# Altium PCB multi-rc522.PcbDoc
Units mil, origin at the board's own origin, x right, y up, seen from the top; angles counter-clockwise.
Board outline 3937.01 x 2300 mil, 2 copper layers (Top Layer, Bottom Layer); 37 components, 33 nets, 181 pads, 334 vias.
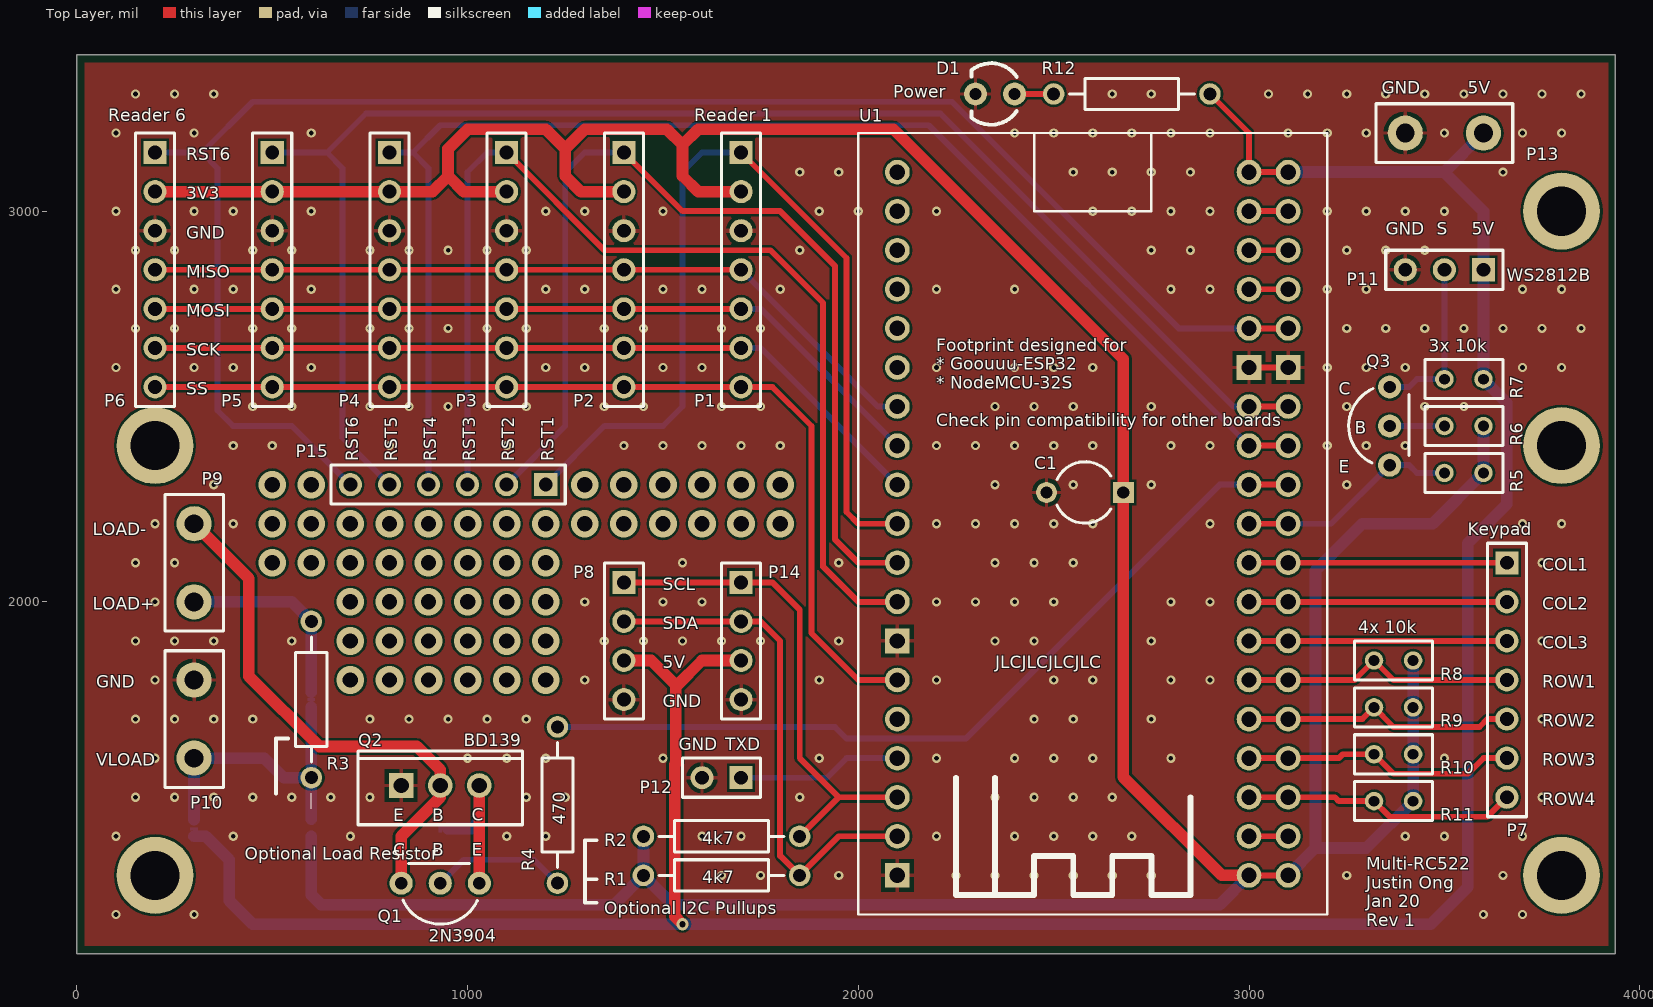
[diagram p0: Top Layer view]
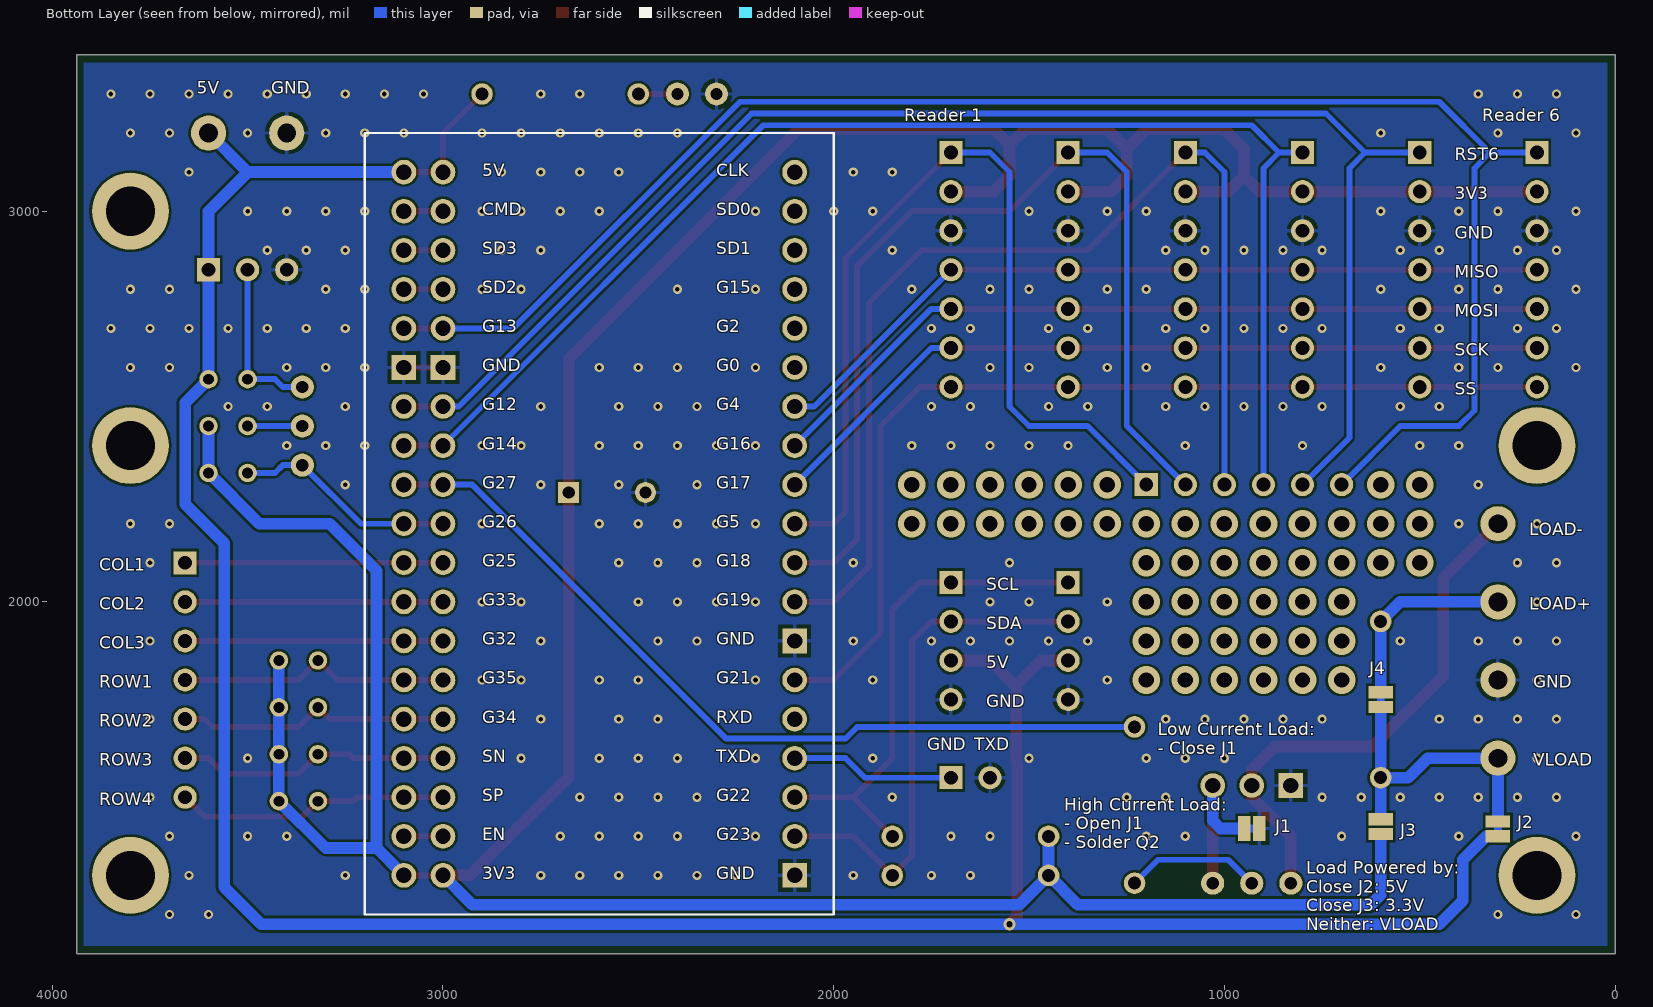
[diagram p1: Bottom Layer view, seen from below]

## Layer stack, top to bottom
Top Solder: solder mask 0.4, Solder Resist, Dk 3.5
Top Layer: signal copper 1.4
Dielectric 1: dielectric 12.6, FR-4, Dk 4.8
Bottom Layer: signal copper 1.4
Bottom Solder: solder mask 0.4, Solder Resist, Dk 3.5

## Board outline
0,1100 0,3400 3937.01,3400 3937.01,1100

## Design rules (kind name [scope] priority, off if disabled: settings)
Clearance [All] p1: gap=6 ignorepadtopadclearanceinfootprint=FALSE
ComponentClearance ComponentClearance_1 [InComponent('C1')] p1: gap=0 collisioncheckmode=3 verticalgap=0 showdistances=FALSE
ComponentClearance [All] p2: gap=10 collisioncheckmode=3 verticalgap=10 showdistances=FALSE
PolygonConnect PolygonConnect_1 [IsStitchingVia] p1: connectstyle=Direct reliefconductorwidth=10 reliefentries=4 polygonreliefangle="90 Angle" airgapwidth=10
PolygonConnect [All] p2: connectstyle=Relief reliefconductorwidth=10 reliefentries=4 polygonreliefangle="90 Angle" airgapwidth=10
RoutingVias [All] p1: holewidth=11.81 width=23.62 viastyle="Through Hole" minholewidth=11.81 minwidth=23.62 maxholewidth=28 maxwidth=196.85
ShortCircuit ShortCircuit_1 [Not InAnyNet vs Not InAnyNet] p1: allowed=TRUE
ShortCircuit [All] p2: allowed=FALSE
SolderMaskExpansion [All] p1: expansion=4
Width [All] p1: maxlimit=50 minlimit=10 preferedwidth=15
28 further rules are at their usual default settings.

## Components (designator, comment, footprint, x,y, rotation, side; value= is the part's Value field where it differs from the comment)
C1 "Cap2" CAPR5-4X5 2580,2280 r180 top value=470uF
D1 "LED" LED 2400,3300 r180 top
J1 "Closed Jumper" "JUMPER (CLOSE)" 930,1420 r180 bottom net-tie
J2 "Closed Jumper" "JUMPER (CLOSE)" 300,1419 r90 bottom net-tie
J3 "Open Jumper" "Jumper (Open)" 600,1425 r90 bottom
J4 "Closed Jumper" "JUMPER (CLOSE)" 600,1750 r270 bottom net-tie
P1 "RFID1" HDR1X7 1700,3150 r270 top
P2 "RFID2" HDR1X7 1400,3150 r270 top
P3 "RFID3" HDR1X7 1100,3150 r270 top
P4 "RFID4" HDR1X7 800,3150 r270 top
P5 "RFID5" HDR1X7 500,3150 r270 top
P6 "RFID6" HDR1X7 200,3150 r270 top
P7 "Keypad" HDR1X7 3660,2100 r270 top
P8 "LCD (I2C)" HDR1X4 1400,2050 r270 top
P9 "Load" RAD-0.2 300,2100 r90 top
P10 "Load Power" RAD-0.2 300,1700 r90 top
P11 "Header 3" HDR1X3 3600,2850 r180 top
P12 "Header 2" HDR1X2 1700,1550 r180 top
P13 "Power" RAD-0.2 3500,3200 r180 top
P14 "I2C" HDR1X4 1700,2050 r270 top
P15 "Header 6" HDR1X6 1200,2300 r180 top
Q1 "2N3904" TO-92A 1030,1280 r180 top
Q2 "BD139" TO-220-AB 930,1530 r0 top
Q3 "2N3904" TO-92A 3360,2350 r90 top
R1 "Res1" AXIAL-0.4 1650,1300 r180 top value=4k7
R2 "Res1" AXIAL-0.4 1650,1400 r180 top value=4k7
R3 "Optional" AXIAL-0.4 600,1750 r90 top value=330
R4 "Res1" AXIAL-0.4 1230,1480 r90 top value=470
R5 "Res1" RAD-0.1 3550,2330 r0 top value=10k
R6 "Res1" RAD-0.1 3550,2450 r0 top value=10k
R7 "Res1" RAD-0.1 3550,2570 r0 top value=10k
R8 "Res1" RAD-0.1 3370,1850 r0 top value=10k
R9 "Res1" RAD-0.1 3370,1730 r0 top value=10k
R10 "Res1" RAD-0.1 3370,1610 r0 top value=10k
R11 "Res1" RAD-0.1 3370,1490 r0 top value=10k
R12 "Res1" AXIAL-0.4 2700,3300 r180 top value=1k
U1 "Goouuu-ESP32/NodeMCU-32S" ESP32 2100,3100 r0 top locked

## Footprints (in the part's own frame and the unit in brackets; to place one, negate y for a bottom-side part, rotate by r counter-clockwise, add the part's x,y. Pads: shape width x height; smd on the part's side, far side on the other; paste and mask are expansions set on the pad)
AXIAL-0.4 [mm] "Axial Device, Thru-Hole; 2 Leads; 0.4 in Pin Spacing"
  round 1.4 hole 0.85: 1(-5.08,0) 2(5.08,0)
  silkscreen extent -4.06,-1.02 4.06,1.02
CAPR5-4X5 [mm] "Capacitor; 2 Leads"
  rect 1.35x1.35 hole 0.8: 1(-2.5,0)
  round 1.35 hole 0.8: 2(2.5,0)
  silkscreen extent -1.69,-2 1.82,2
ESP32 [mm] "Footprint for 48.26mm x 25.4mm or 48.26mm x 27.9mm ESP32"
  round 1.6 hole 1: 1(0,0) 2(0,-2.54) 3(0,-5.08) 4(0,-7.62) 5(0,-10.16) 6(0,-12.7) 7(0,-15.24) 8(0,-17.78) 9(0,-20.32) 10(0,-22.86) 11(0,-25.4) 12(0,-27.94) 14(0,-33.02) 15(0,-35.56) 16(0,-38.1) 17(0,-40.64) 18(0,-43.18) 20(22.86,-45.72) 20(25.4,-45.72) 21(22.86,-43.18) 21(25.4,-43.18) 22(22.86,-40.64) 22(25.4,-40.64) 23(22.86,-38.1) 23(25.4,-38.1) 24(22.86,-35.56) 24(25.4,-35.56) 25(22.86,-33.02) 25(25.4,-33.02) 26(22.86,-30.48) 26(25.4,-30.48) 27(22.86,-27.94) 27(25.4,-27.94) 28(22.86,-25.4) 28(25.4,-25.4) 29(22.86,-22.86) 29(25.4,-22.86) 30(22.86,-20.32) 30(25.4,-20.32) 31(22.86,-17.78) 31(25.4,-17.78) 32(22.86,-15.24) 32(25.4,-15.24) 34(22.86,-10.16) 34(25.4,-10.16) 35(22.86,-7.62) 35(25.4,-7.62) 36(22.86,-5.08) 36(25.4,-5.08) 37(22.86,-2.54) 37(25.4,-2.54) 38(22.86,0) 38(25.4,0)
  rect 1.6x1.6 hole 1: 13(0,-30.48) 19(0,-45.72) 33(22.86,-12.7) 33(25.4,-12.7)
  Top Layer lines w0.381: 22.86,-45.72 25.4,-45.72 ; 22.86,-43.18 25.4,-43.18 ; 22.86,-40.64 25.4,-40.64 ; 22.86,-38.1 25.4,-38.1 ; 22.86,-35.56 25.4,-35.56 ; 22.86,-33.02 25.4,-33.02 ; 22.86,-30.48 25.4,-30.48 ; 22.86,-27.94 25.4,-27.94 ; 22.86,-25.4 25.4,-25.4 ; 22.86,-22.86 25.4,-22.86 ; 22.86,-20.32 25.4,-20.32 ; 22.86,-17.78 25.4,-17.78 ; 22.86,-15.24 25.4,-15.24 ; 22.86,-12.7 25.4,-12.7 ; 22.86,-10.16 25.4,-10.16 ; 22.86,-7.62 25.4,-7.62 ; 22.86,-5.08 25.4,-5.08 ; 22.86,-2.54 25.4,-2.54 ; 22.86,0 25.4,0
  silkscreen extent -2.54,-48.26 27.94,2.54
HDR1X2 [mm] "Connector; Header; 2 Position"
  rect 1.5x1.5 hole 0.9: 1(0,0)
  round 1.5 hole 0.9: 2(2.54,0)
  silkscreen extent -1.27,-1.27 3.81,1.27
HDR1X3 [mm] "Connector; Header; 3 Position"
  rect 1.5x1.5 hole 0.9: 1(0,0)
  round 1.5 hole 0.9: 2(2.54,0) 3(5.08,0)
  silkscreen extent -1.27,-1.27 6.35,1.27
HDR1X4 [mm] "Connector; Header; 4 Position"
  rect 1.5x1.5 hole 0.9: 1(0,0)
  round 1.5 hole 0.9: 2(2.54,0) 3(5.08,0) 4(7.62,0)
  silkscreen extent -1.27,-1.27 8.89,1.27
HDR1X6 [mm] "Connector; Header; 6 Position"
  rect 1.5x1.5 hole 0.9: 1(0,0)
  round 1.5 hole 0.9: 2(2.54,0) 3(5.08,0) 4(7.62,0) 5(10.16,0) 6(12.7,0)
  silkscreen extent -1.27,-1.27 13.97,1.27
HDR1X7 [mm] "Connector; Header; 7 Position"
  rect 1.5x1.5 hole 0.9: 1(0,0)
  round 1.5 hole 0.9: 2(2.54,0) 3(5.08,0) 4(7.62,0) 5(10.16,0) 6(12.7,0) 7(15.24,0)
  silkscreen extent -1.27,-1.27 16.51,1.27
"JUMPER (CLOSE)" [mm]
  rect 0.8x1.6 smd: 1(-0.483,0) 2(0.483,0)
  Top Layer region: -0.102,0.254 0.102,0.254 0.102,-0.254 -0.102,-0.254
  Top Layer lines w0: 0.076,0 -0.483,0
"Jumper (Open)" [mm]
  rect 0.8x1.6 smd: 1(-0.483,0) 2(0.483,0)
LED [mm] "0.1\" Pitch LED"
  round 1.5 hole 0.8: 1(0,0) 2(2.54,0)
  silkscreen extent -0.14,-2 2.8,2
RAD-0.1 [mm] "Radial Cap, Thru-Hole; 2 Leads; 0.1 in Pin Spacing"
  round 1.2 hole 0.7: 1(-1.27,0) 2(1.27,0)
  silkscreen extent -2.54,-1.27 2.54,1.27
RAD-0.2 [mil] "Radial Cap, Thru-Hole; 2 Leads; 0.2 in Pin Spacing"
  round 90 hole 48: 1(-100,0) 2(100,0)
  silkscreen extent -175,-75 175,75
TO-92A [mm] "TO-92 Footprint 0.1\" Pitch"
  round 1.5 hole 0.8: 1(0,0) 2(2.54,0) 3(5.08,0)
  silkscreen extent 0.13,-1.27 4.97,2.66
TO-220-AB [mm] "TO, Thru-Hole, Vertical, Heatsink Mounted; 3 In-Line Leads; Pitch 2.54 mm"
  rect 1.6x1.6 hole 1: 1(-2.54,0)
  round 1.6 hole 1: 2(0,0) 3(2.54,0)
  silkscreen extent -5.35,-2.55 5.35,2.25

## Part data
C1: "Capacitor", PackageDescription="Capacitor; 2 Leads", PackageReference=CAPR5-4X5, Published=23-Sep-2002, Publisher="Altium Limited"
J1 J2 J4: library part "Jumper (Closed)"
J3: library part "Jumper (Open)"
P1 P2 P3 P4 P5 P6 P7: library part "Header 7", "Header, 7-Pin", LatestRevisionDate=17-Jul-2002, LatestRevisionNote="Re-released for DXP Platform.", Publisher="Altium Limited"
P8 P14: library part "Header 4", "Header, 4-Pin", LatestRevisionDate=17-Jul-2002, LatestRevisionNote="Re-released for DXP Platform.", Publisher="Altium Limited"
P9 P10 P13: library part "Header 2", "Header, 2-Pin", LatestRevisionDate=17-Jul-2002, LatestRevisionNote="Re-released for DXP Platform.", Publisher="Altium Limited"
P11: "Header, 3-Pin", LatestRevisionDate=17-Jul-2002, LatestRevisionNote="Re-released for DXP Platform.", Publisher="Altium Limited"
P12: "Header, 2-Pin", LatestRevisionDate=17-Jul-2002, LatestRevisionNote="Re-released for DXP Platform.", Publisher="Altium Limited"
P15: "Header, 6-Pin", LatestRevisionDate=17-Jul-2002, LatestRevisionNote="Re-released for DXP Platform.", Publisher="Altium Limited"
Q1 Q3: "NPN General Purpose Amplifier", ComponentLink1Description="Manufacturer Link", ComponentLink1URL=http://www.fairchildsemi.com/, ComponentLink2Description=Datasheet, ComponentLink2URL=http://www.fairchildsemi.com/ds/2N%2F2N3904.pdf, DatasheetVersion=1997, LatestRevisionDate=15-Jan-2003, LatestRevisionNote="PCB Footprint 'BCY-W3/D4.7' replaced", PackageDescription="TO, Flat Index; 3 In-Line, Axial Leads; Body Dia. 4.5mm; Leads 0.51 x 0.48 mm (max)", PackageReference=TO-92A, PackageVersion=Sep-1998, Published=8-Jun-2000, Publisher="Altium Limited"
Q2: library part 2N3904, "NPN General Purpose Amplifier", ComponentLink1Description="Manufacturer Link", ComponentLink1URL=http://www.fairchildsemi.com/, ComponentLink2Description=Datasheet, ComponentLink2URL=http://www.fairchildsemi.com/ds/2N%2F2N3904.pdf, DatasheetVersion=1997, LatestRevisionDate=15-Jan-2003, LatestRevisionNote="PCB Footprint 'BCY-W3/D4.7' replaced", PackageDescription="TO, Flat Index; 3 In-Line, Axial Leads; Body Dia. 4.5mm; Leads 0.51 x 0.48 mm (max)", PackageReference=TO-92A, PackageVersion=Sep-1998, Published=8-Jun-2000, Publisher="Altium Limited"
R1 R2 R4 R5 R6 R7 R8 R9 R10 R11 R12: "Resistor", LatestRevisionDate=17-Jul-2002, LatestRevisionNote="Re-released for DXP Platform.", PackageDescription="Axial Device, Thru-Hole; 2 Leads; 0.3 in Pin Spacing", PackageReference=AXIAL-0.3, Published=8-Jun-2000, Publisher="Altium Limited"
R3: library part Res1, "Resistor", LatestRevisionDate=17-Jul-2002, LatestRevisionNote="Re-released for DXP Platform.", PackageDescription="Axial Device, Thru-Hole; 2 Leads; 0.3 in Pin Spacing", PackageReference=AXIAL-0.3, Published=8-Jun-2000, Publisher="Altium Limited"
U1: library part ESP32
D1: LatestRevisionDate=17-Jul-2002, LatestRevisionNote="Re-released for DXP Platform.", PackageDescription="SM LED; 2 Flat Leads", PackageReference=3.2X1.6X1.1, PackageVersion=Feb-2002, Published=8-Jun-2000, Publisher="Altium Limited"

## Free pads (board coordinates)
  round 196.85 hole 125.98: M1(200,1300) M1(200,2400) M1(3800,1300) M1(3800,2400) M1(3800,3000)

## Via types
v1: diameter 23.62, hole 11.81, Top Layer to Bottom Layer, tented both sides, 285 vias
v2: diameter 70.87, hole 39.37, Top Layer to Bottom Layer, 48 vias
v3: diameter 31.5, hole 15.75, Top Layer to Bottom Layer, 1 vias

## Nets (pads, with @x,y where several pads share a name; then routed paths per layer and width w, separated by ;. In a path a pad name is that pad's centre, name@x,y a point inside that pad or via, vN(x,y) a via of type N, cw(c..) or ccw(c..) an arc to the next point about the centre after c; other vN are vias at no path point)
3V3: C1.1 J3.1 P1.2 P2.2 P3.2 P4.2 P5.2 P6.2 R1.2 R2.2 R5.2 R6.2 R8.2 R9.2 R10.2 R11.2 U1.20 | length 9925.3
  Top Layer w30: P6.2 P5.2 P4.2 910,3050 950,3090 ; P3.2 990,3050 950,3090 ; P2.2 1290,3050 1250,3090 1250,3160 ; P1.2 1590,3050 1550,3090 1550,3170 ; U1.20@3000,1300 2930,1300 2678.43,1551.57 C1.1 2678.43,2621.57 2090,3210 1590,3210 1550,3170 ; 950,3090 950,3160 1000,3210 1200,3210 1250,3160 ; 1250,3160 1300,3210 1510,3210 1550,3170
  Bottom Layer w30: J3.1@600,1400 600,1250 625,1225 1375,1225 R1.2 ; R2.2 R1.2 ; U1.20@3000,1300 2925,1225 1525,1225 R1.2 ; U1.20@3100,1300 3170,1370 ; R8.2 R9.2 R10.2 R11.2 3300,1370 3170,1370 ; R6.2 R5.2 3470,2200 3290,2200 3170,2080 3170,1370
5V: J2.1 P8.3 P11.1 P13.1 P14.3 R7.2 R12.1 U1.38 | length 7147
  Top Layer w15: R12.1 3000,3200 U1.38@3000,3100
  Top Layer w30: P8.3 1470,1850 1532.81,1787.19 1532.81,1586.41 1530,1583.6 1530,1195 v3(1550,1175) ; 1535,1785 1600,1850 P14.3
  Bottom Layer w30: J2.1 330,1400 390,1340 390,1235 450,1175 v3(1550,1175) 3465,1175 3560,1270 3560,2150 3660,2250 3660,2510 R7.2 P11.1 3600,3000 3500,3100 ; U1.38@3100,3100 3500,3100 ; P13.1 3500,3100
DRIVE: R4.2 U1.30 | length 2051.7
  Bottom Layer w15: R4.2 1940,1680 1970,1650 2275,1650 2925,2300 U1.30@3000,2300
GND: C1.2 D1.2 J1.2 P1.3 P2.3 P3.3 P4.3 P5.3 P6.3 P8.4 P10.2 P11.3 P12.2 P13.2 P14.4 Q2.1 U1.13 U1.19 U1.33
  other v1: 100,1200 300,1200 3600,1200 3700,1200 1650,1300 1750,1300 1950,1300 2250,1300 2350,1300 2450,1300 2550,1300 2650,1300 2750,1300 3250,1300 3650,1300 100,1400 400,1400 700,1400 1100,1400 1200,1400 1600,1400 1700,1400 2200,1400 2400,1400 2500,1400 2600,1400 2700,1400 3400,1400 3500,1400 3700,1400 150,1500 250,1500 350,1500 450,1500 550,1500 650,1500 750,1500 1150,1500 1250,1500 1850,1500 2350,1500 2450,1500 2550,1500 2650,1500 3750,1500 200,1600 1000,1600 1100,1600 1200,1600 1500,1600 1900,1600 2200,1600 2400,1600 2500,1600 2600,1600 2800,1600 3500,1600 150,1700 250,1700 350,1700 450,1700 750,1700 850,1700 950,1700 1050,1700 1150,1700 2450,1700 2550,1700 2750,1700 3750,1700 200,1800 1300,1800 1900,1800 2200,1800 2500,1800 2600,1800 2800,1800 2900,1800 150,1900 250,1900 350,1900 550,1900 1350,1900 1450,1900 1550,1900 1650,1900 1750,1900 1950,1900 2350,1900 2450,1900 2750,1900 3750,1900 200,2000 1300,2000 1500,2000 1600,2000 2200,2000 2300,2000 2400,2000 2500,2000 2800,2000 2900,2000 150,2100 250,2100 1550,2100 1950,2100 2350,2100 2450,2100 2550,2100 3750,2100 200,2200 400,2200 2200,2200 2300,2200 2400,2200 2500,2200 2600,2200 2900,2200 3700,2200 3800,2200 350,2300 2350,2300 2550,2300 2750,2300 3250,2300 400,2400 500,2400 800,2400 1100,2400 1400,2400 1500,2400 1600,2400 1700,2400 1800,2400 2200,2400 2300,2400 2400,2400 2500,2400 2600,2400 2800,2400 2900,2400 3200,2400 3300,2400 3400,2400 450,2500 550,2500 750,2500 850,2500 950,2500 1050,2500 1150,2500 1350,2500 1450,2500 1650,2500 1750,2500 2350,2500 2450,2500 2550,2500 2750,2500 3250,2500 3450,2500 3550,2500 100,2600 300,2600 400,2600 600,2600 1200,2600 1300,2600 1500,2600 1600,2600 2200,2600 2400,2600 2500,2600 2600,2600 3200,2600 3300,2600 3400,2600 3700,2600 3800,2600 150,2700 250,2700 450,2700 550,2700 750,2700 850,2700 950,2700 1050,2700 1150,2700 1350,2700 1450,2700 1650,2700 1750,2700 3250,2700 3350,2700 3450,2700 3550,2700 3650,2700 3750,2700 3850,2700 100,2800 300,2800 400,2800 600,2800 1200,2800 1300,2800 1500,2800 1600,2800 1800,2800 2200,2800 2400,2800 2800,2800 2900,2800 3200,2800 3300,2800 3700,2800 3800,2800 150,2900 250,2900 450,2900 550,2900 750,2900 850,2900 950,2900 1050,2900 1150,2900 1850,2900 2750,2900 2850,2900 3250,2900 3350,2900 3450,2900 100,3000 300,3000 400,3000 600,3000 1200,3000 1300,3000 1500,3000 1900,3000 2000,3000 2200,3000 2600,3000 2700,3000 2800,3000 2900,3000 3200,3000 3300,3000 3400,3000 3500,3000 1850,3100 1950,3100 2550,3100 2650,3100 2750,3100 2850,3100 3650,3100 100,3200 300,3200 600,3200 2400,3200 2500,3200 2600,3200 2700,3200 2800,3200 2900,3200 3100,3200 3200,3200 3300,3200 3500,3200 3700,3200 3800,3200 150,3300 250,3300 350,3300 2650,3300 2750,3300 3050,3300 3150,3300 3250,3300 3350,3300 3450,3300 3550,3300 3650,3300 3750,3300 3850,3300
I2C_SCL: P8.1 P14.1 R2.1 U1.17 | length 1291.8
  Top Layer w15: P8.1 P14.1 1780,2050 1850,1980 1850,1600 1950,1500 ; R2.1 1950,1500 ; U1.17 1950,1500
I2C_SDA: P8.2 P14.2 R1.1 U1.18 | length 1332.8
  Top Layer w15: P8.2 P14.2 1750,1950 1800,1900 1800,1350 R1.1 1950,1400 U1.18
KP_COL1: P7.1 U1.28 | length 560
  Top Layer w15: U1.28@3100,2100 P7.1
KP_COL2: P7.2 U1.27 | length 560
  Top Layer w15: U1.27@3100,2000 P7.2
KP_COL3: P7.3 U1.26 | length 560
  Top Layer w15: U1.26@3100,1900 P7.3
KP_ROW1: P7.4 R8.1 U1.25 | length 601.4
  Top Layer w15: U1.25@3100,1800 3270,1800 R8.1 3370,1800 P7.4
KP_ROW2: P7.5 R9.1 U1.24 | length 601.4
  Top Layer w15: U1.24@3100,1700 3290,1700 R9.1 3370,1680 3590,1680 3610,1700 P7.5
KP_ROW3: P7.6 R10.1 U1.23 | length 601.4
  Top Layer w15: U1.23@3100,1600 3230,1600 3240,1610 R10.1 3370,1560 3560,1560 3600,1600 P7.6
KP_ROW4: P7.7 R11.1 U1.22 | length 601.4
  Top Layer w15: U1.22@3100,1500 3220,1500 3230,1490 R11.1 3360,1450 3610,1450 P7.7
MISO: P1.4 P2.4 P3.4 P4.4 P5.4 P6.4 U1.7 | length 2045
  Top Layer w15: P6.4 P5.4 P4.4 P3.4 P2.4 P1.4
  Bottom Layer w15: P1.4 2050,2500 U1.7
MOSI: P1.5 P2.5 P3.5 P4.5 P5.5 P6.5 U1.8 | length 2045
  Top Layer w15: P6.5 P5.5 P4.5 P3.5 P2.5 P1.5
  Bottom Layer w15: P1.5 1750,2750 U1.8
NetD1_1: D1.1 R12.2 | length 100
  Top Layer w15: D1.1 R12.2
NetJ1_1: J1.1 Q1.1 Q2.3 | length 429.3
  Top Layer w30: Q1.1 Q2.3
  Bottom Layer w30: J1.1 1010,1420 1030,1440 Q2.3
NetJ4_1: J4.1 P9.1 R3.2 | length 501.7
  Bottom Layer w30: P9.1 550,2000 R3.2 J4.1
NetP9_2: P9.2 Q1.3 Q2.2 | length 1368.8
  Top Layer w30: P9.2 440,2060 440,1810 620,1630 870,1630 930,1570 Q2.2 930,1500 830,1400 Q1.3
NetP11_2: P11.2 Q3.3 R7.1 | length 428.3
  Bottom Layer w15: Q3.3 3410,2550 3430,2570 R7.1 P11.2
NetQ1_2: Q1.2 R4.1 | length 349.7
  Bottom Layer w15: Q1.2 990,1340 1170,1340 R4.1
NetQ3_2: Q3.2 R6.1 | length 140
  Bottom Layer w15: Q3.2 R6.1
RST1: P1.1 P15.1 U1.10 | length 2377.8
  Top Layer w15: P1.1 1970,2880 1970,2230 2000,2200 U1.10
  Bottom Layer w15: P15.1 1350,2450 1500,2450 1550,2500 1550,3100 1600,3150 P1.1
RST2: P2.1 P15.2 U1.11 | length 2577.8
  Top Layer w15: P2.1 1550,3000 1800,3000 1940,2860 1940,2160 2000,2100 U1.11
  Bottom Layer w15: P15.2 1250,2450 1250,3100 1300,3150 P2.1
RST3: P3.1 P15.3 U1.12 | length 2792.5
  Top Layer w15: P3.1 1350,2900 1775,2900 1910,2765 1910,2090 2000,2000 U1.12
  Bottom Layer w15: P15.3 1000,3100 1050,3150 P3.1
RST4: P4.1 P15.4 U1.31 | length 3435.2
  Bottom Layer w15: P4.1 860,3150 ; P15.4 900,3110 860,3150 ; U1.31@3000,2400 2180,3220 930,3220 860,3150
RST5: P5.1 P15.5 U1.32 | length 3768.4
  Bottom Layer w15: P5.1 640,3150 ; P15.5 680,2420 680,3110 640,3150 ; U1.32@3000,2500 2960,2500 2210,3250 740,3250 640,3150
RST6: P6.1 P15.6 U1.34 | length 4189.4
  Bottom Layer w15: P6.1 320,3150 ; P15.6 550,2450 400,2450 360,2490 360,3110 320,3150 ; U1.34@3000,2700 2820,2700 2240,3280 450,3280 320,3150
SCK: P1.6 P2.6 P3.6 P4.6 P5.6 P6.6 U1.9 | length 2045
  Top Layer w15: P6.6 P5.6 P4.6 P3.6 P2.6 P1.6
  Bottom Layer w15: P1.6 1750,2650 U1.9
SS: P1.7 P2.7 P3.7 P4.7 P5.7 P6.7 U1.14 | length 2521.1
  Top Layer w15: P6.7 P5.7 P4.7 P3.7 P2.7 P1.7 1780,2550 1880,2450 1880,1920 2000,1800 U1.14
TXD: P12.1 U1.16 | length 420.7
  Bottom Layer w15: P12.1 1920,1550 1970,1600 U1.16
VLOAD: J2.2 J3.2 J4.2 P10.1 R3.1 | length 764.7
  Bottom Layer w30: J2.2@300,1443 P10.1 480,1600 530,1550 R3.1 ; J3.2 R3.1 ; J4.2 R3.1
WS2812B: Q3.1 R5.1 U1.29 | length 470.4
  Bottom Layer w15: U1.29@3100,2200 3210,2200 Q3.1 3410,2350 3430,2330 R5.1
pads on no net: U1.1 U1.2 U1.3 U1.4 U1.5 U1.6 U1.15 U1.21 U1.35 U1.36 U1.37
copper on no net:
  other v2: 700,1800 800,1800 900,1800 1000,1800 1100,1800 1200,1800 700,1900 800,1900 900,1900 1000,1900 1100,1900 1200,1900 700,2000 800,2000 900,2000 1000,2000 1100,2000 1200,2000 500,2100 600,2100 700,2100 800,2100 900,2100 1000,2100 1100,2100 1200,2100 500,2200 600,2200 700,2200 800,2200 900,2200 1000,2200 1100,2200 1200,2200 1300,2200 1400,2200 1500,2200 1600,2200 1700,2200 1800,2200 500,2300 600,2300 1300,2300 1400,2300 1500,2300 1600,2300 1700,2300 1800,2300

## Polygon pours and split planes (outlines as drawn)
GND on Bottom Layer "Bottom Layer-GND" (solid, remove dead copper, pour order 4): 20,1120 3920,1120 3920,3380 20,3380
GND on Top Layer "Top Layer-GND" (solid, remove dead copper, pour order 2): 20,1120 3920,1120 3920,3380 20,3380

## Silkscreen, mask and mechanical layers (free items; w line width, h text height)
Top Overlay:
  lines w0: 600,1470 600,1510
  lines w10: 510,1510 510,1650 540,1650 ; 1300,1290 1330,1290 ; 1330,1230 1300,1230 1300,1390 1330,1390
  text "GND" at 3340,3300 h32.01
  text "5V" at 3560,3300 h32.01
  text "Power" at 2090,3290 h32.01
  text "Reader 6" at 80,3230 h32.01
  text "Reader 1" at 1580,3230 h32.01
  text "RST6" at 280,3130 h32.01
  text "3V3" at 280,3030 h32.01
  text "GND" at 3350,2940 h32.01
  text "S" at 3480,2940 h32.01
  text "5V" at 3570,2940 h32.01
  text "GND" at 280,2930 h32.01
  text "MISO" at 280,2830 h32.01
  text "WS2812B" at 3660,2820 h32.01
  text "MOSI" at 280,2730 h32.01
  text "3x 10k" at 3460,2640 h32.01
  text "SCK" at 280,2630 h32.01
  text "SS" at 280,2530 h32.01
  text "C" at 3230,2530 h32.01
  text "B" at 3270,2430 h32.01
  text "RST6" at 720,2360 h32.01 r90
  text "RST5" at 820,2360 h32.01 r90
  text "RST4" at 920,2360 h32.01 r90
  text "RST3" at 1020,2360 h32.01 r90
  text "RST2" at 1120,2360 h32.01 r90
  text "RST1" at 1220,2360 h32.01 r90
  text "E" at 3230,2330 h32.01
  text "LOAD-" at 40,2170 h32.01
  text "Keypad" at 3560,2170 h32.01
  text "COL1" at 3750,2080 h32.01
  text "SCL" at 1500,2030 h32.01
  text "LOAD+" at 40,1980 h32.01
  text "COL2" at 3750,1980 h32.01
  text "SDA" at 1500,1930 h32.01
  text "4x 10k" at 3280,1920 h32.01
  text "COL3" at 3750,1880 h32.01
  text "5V" at 1500,1830 h32.01
  text "JLCJLCJLCJLC" at 2350,1830 h32.01
  text "GND" at 50,1780 h32.01
  text "ROW1" at 3750,1780 h32.01
  text "GND" at 1500,1730 h32.01
  text "ROW2" at 3750,1680 h32.01
  text "BD139" at 990,1630 h32.01
  text "GND" at 1540,1620 h32.01
  text "TXD" at 1660,1620 h32.01
  text "VLOAD" at 50,1580 h32.01
  text "ROW3" at 3750,1580 h32.01
  text "ROW4" at 3750,1480 h32.01
  text "C" at 1010,1440 h32.01
  text "E" at 809.68,1438.15 h32.01
  text "B" at 909.68,1438.15 h32.01
  text "470" at 1250,1430 h32.01 r90
  text "4k7" at 1600,1380 h32.01
  text "C" at 810,1350 h32.01
  text "B" at 910,1350 h32.01
  text "E" at 1010,1350 h32.01
  text "Optional Load Resistor" at 430,1340 h32.01
  text "4k7" at 1600,1280 h32.01
  text "Optional I2C Pullups" at 1350,1200 h32.01
  text "Multi-RC522 / Justin Ong / Jan 20 / Rev 1" at 3300,1170 h32.01
  text "2N3904" at 900,1130 h32.01
Bottom Overlay:
  text "GND" at 3440,3300 h32.01
  text "5V" at 3630,3300 h32.01
  text "Reader 6" at 340,3230 h32.01
  text "Reader 1" at 1820,3230 h32.01
  text "RST6" at 410,3130 h32.01
  text "3V3" at 410,3030 h32.01
  text "GND" at 410,2930 h32.01
  text "MISO" at 410,2830 h32.01
  text "MOSI" at 410,2730 h32.01
  text "SCK" at 410,2630 h32.01
  text "SS" at 410,2530 h32.01
  text "LOAD-" at 220,2170 h32.01
  text "COL1" at 3880,2080 h32.01
  text "SCL" at 1610,2030 h32.01
  text "LOAD+" at 220,1980 h32.01
  text "COL2" at 3880,1980 h32.01
  text "SDA" at 1610,1930 h32.01
  text "COL3" at 3880,1880 h32.01
  text "5V" at 1610,1830 h32.01
  text "GND" at 210,1780 h32.01
  text "ROW1" at 3880,1780 h32.01
  text "GND" at 1610,1730 h32.01
  text "ROW2" at 3880,1680 h32.01
  text "TXD" at 1640,1620 h32.01
  text "GND" at 1760,1620 h32.01
  text "Low Current Load: / - Close J1" at 1170,1610 h32.01
  text "VLOAD" at 210,1580 h32.01
  text "ROW3" at 3880,1580 h32.01
  text "ROW4" at 3880,1480 h32.01
  text "High Current Load: / - Open J1 / - Solder Q2" at 1410,1370 h32.01
  text "Load Powered by: / Close J2: 5V / Close J3: 3.3V / Neither: VLOAD" at 790,1160 h32.01
Mechanical 15:
  the board outline again, w20

## Text inside footprints (layer, text, board x,y; h text height)
U1: Top Overlay "Footprint designed for / * Goouuu-ESP32 / * NodeMCU-32S /  / Check pin compatibility for other boards" at 2200,2450 h32; Bottom Overlay "GND" at 2900,2590 h32; Bottom Overlay "GND" at 2300,1890 h32; Bottom Overlay "GND" at 2300,1290 h32; Bottom Overlay "G23" at 2300,1390 h32; Bottom Overlay "G22" at 2300,1490 h32; Bottom Overlay "TXD" at 2300,1590 h32; Bottom Overlay "RXD" at 2300,1690 h32; Bottom Overlay "G21" at 2300,1790 h32; Bottom Overlay "G19" at 2300,1990 h32; Bottom Overlay "G18" at 2300,2090 h32; Bottom Overlay "G5" at 2300,2190 h32; Bottom Overlay "G17" at 2300,2290 h32; Bottom Overlay "G16" at 2300,2390 h32; Bottom Overlay "G4" at 2300,2490 h32; Bottom Overlay "G0" at 2300,2590 h32; Bottom Overlay "G2" at 2300,2690 h32; Bottom Overlay "G15" at 2300,2790 h32; Bottom Overlay "SD1" at 2300,2890 h32; Bottom Overlay "SD0" at 2300,2990 h32; Bottom Overlay "CLK" at 2300,3090 h32; Bottom Overlay "5V" at 2900,3090 h32; Bottom Overlay "CMD" at 2900,2990 h32; Bottom Overlay "SD3" at 2900,2890 h32; Bottom Overlay "SD2" at 2900,2790 h32; Bottom Overlay "G13" at 2900,2690 h32; Bottom Overlay "G12" at 2900,2490 h32; Bottom Overlay "G14" at 2900,2390 h32; Bottom Overlay "G27" at 2900,2290 h32; Bottom Overlay "G26" at 2900,2190 h32; Bottom Overlay "G25" at 2900,2090 h32; Bottom Overlay "G33" at 2900,1990 h32; Bottom Overlay "G32" at 2900,1890 h32; Bottom Overlay "G35" at 2900,1790 h32; Bottom Overlay "G34" at 2900,1690 h32; Bottom Overlay "SN" at 2900,1590 h32; Bottom Overlay "SP" at 2900,1490 h32; Bottom Overlay "EN" at 2900,1390 h32; Bottom Overlay "3V3" at 2900,1290 h32